# EAGLE board pms (EAGLE 9.6.1)
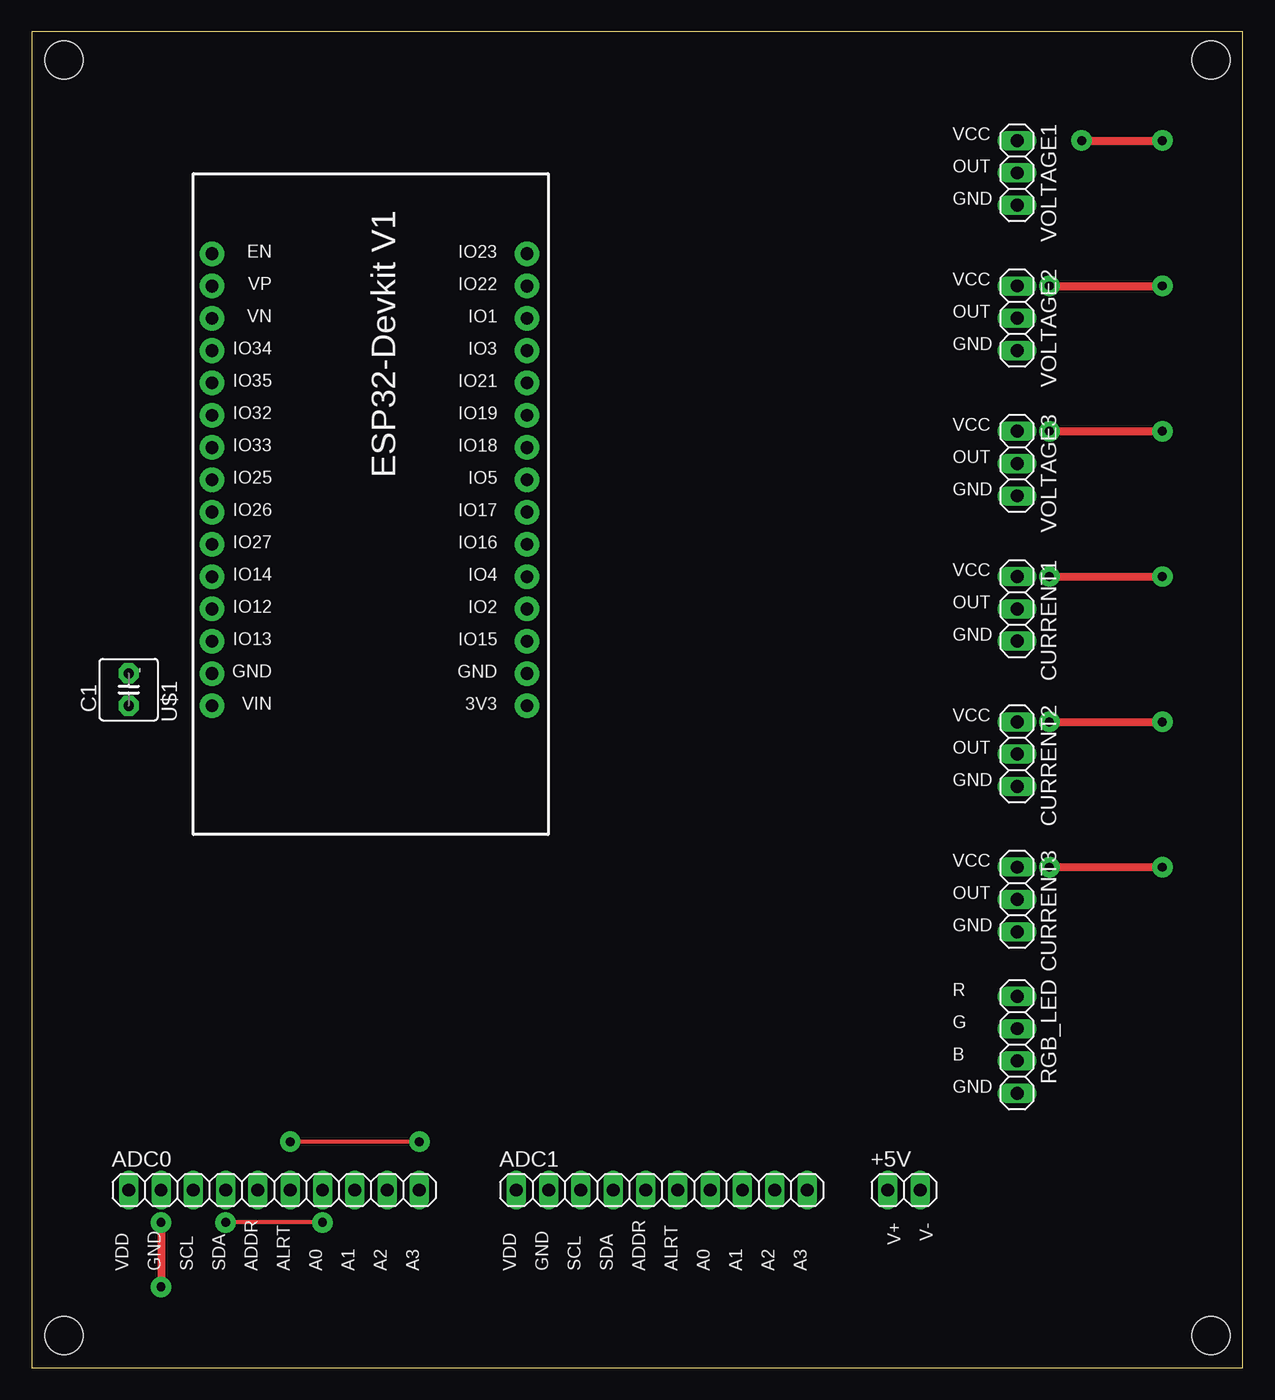
[diagram p0: board, top side]
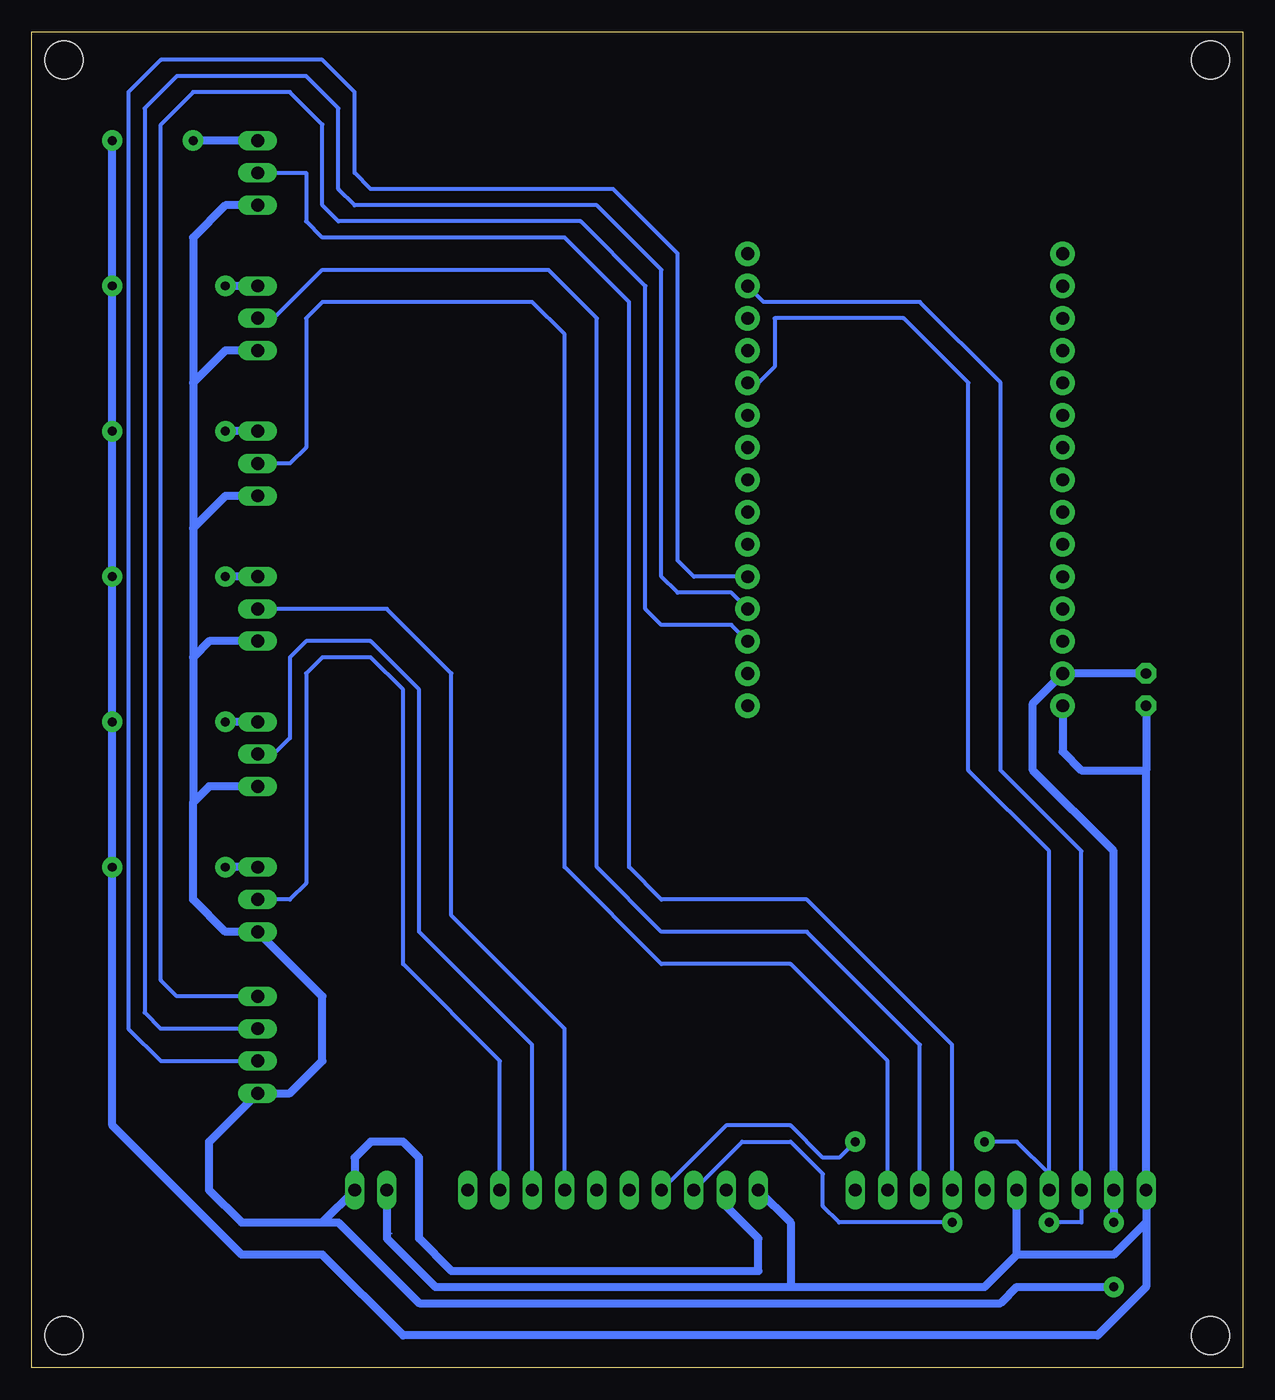
[diagram p1: board, bottom side, seen from below]

Size 95.23 x 105.08 mm. Coordinates in mm from the lower left corner, seen from the top.
Outline: 0,0 95.23,0 95.23,105.08 0,105.08 0,0
Copper layers (1*16): Top 0.035mm / dielectric 1.5mm / Bottom 0.035mm
Design rules "default": minimum track width 6mil, minimum drill 0.35mm, track to track 6mil, track to pad 6mil, pad to pad 6mil, via to via 6mil, smd to smd 6mil, copper to edge 40mil, drill to drill 6mil, minimum pad ring 10mil, minimum via ring 8mil, stop-mask expansion 4mil, vias tented up to drill 0mil, thermal gap 10mil
Holes 3 mm at 2.54,102.87 2.54,2.54 92.71,2.54 92.71,102.87

## Footprints (pad centres in the part's own frame; a part is rotated, then mirrored left to right if it is on the bottom)
1X02 = drill 1.016 long: 1 -1.27,0; 2 1.27,0
1X10 = drill 1.016 long: 1 -11.43,0; 2 -8.89,0; 3 -6.35,0; 4 -3.81,0; 5 -1.27,0; 6 1.27,0; 7 3.81,0; 8 6.35,0; 9 8.89,0; 10 11.43,0
C2.5-5 = drill 0.813 pad 1.6 octagon: 1 -1.27,0; 2 1.27,0
1X03 = drill 1.016 long: 1 -2.54,0; 2 0,0; 3 2.54,0
1X04 = drill 1.016 long: 1 -3.81,0; 2 -1.27,0; 3 1.27,0; 4 3.81,0
ESP32-DEVKITV1 = drill 1 pad 1.93: 1 -22.87,-13.54; 2 -20.33,-13.54; 3 -17.79,-13.54; 4 -15.25,-13.54; 5 -12.71,-13.54; 6 -10.17,-13.54; 7 -7.63,-13.54; 8 -5.09,-13.54; 9 -2.55,-13.54; 10 -0.01,-13.54; 11 2.53,-13.54; 12 5.07,-13.54; 13 7.61,-13.54; 14 10.15,-13.54; 15 12.69,-13.54; 16 12.69,11.23; 17 10.15,11.23; 18 7.61,11.23; 19 5.07,11.23; 20 2.53,11.23; 21 -0.01,11.23; 22 -2.55,11.23; 23 -5.09,11.23; 24 -7.63,11.23; 25 -10.17,11.23; 26 -12.71,11.23; 27 -15.25,11.23; 28 -17.79,11.23; 29 -20.33,11.23; 30 -22.87,11.23

## Placement (x,y rotation side)
+5V  [1X02]  68.58,13.97 0 top
ADC0  [1X10]  19.05,13.97 0 top
ADC1  [1X10]  49.53,13.97 0 top
C1  [C2.5-5]  7.62,53.34 90 top
CURRENT1  [1X03]  77.47,59.69 270 top
CURRENT2  [1X03]  77.47,48.26 270 top
CURRENT3  [1X03]  77.47,36.83 270 top
RGB_LED  [1X04]  77.47,25.4 270 top
U$1  ESP32DEVKITV1  [ESP32-DEVKITV1]  25.4,74.93 90 top
VOLTAGE1  [1X03]  77.47,93.98 270 top
VOLTAGE2  [1X03]  77.47,82.55 270 top
VOLTAGE3  [1X03]  77.47,71.12 270 top

## Library data of the parts
+5V ADC0 ADC1 CURRENT1-CURRENT3 RGB_LED VOLTAGE1-VOLTAGE3 = pinhead
C1 = capacitor-wima
U$1 = ESP32-DEVKITV1

## Nets
A0: ADC0.7 VOLTAGE1.2
A1: ADC0.8 VOLTAGE2.2
A2: ADC0.9 VOLTAGE3.2
A3: ADC1.7 CURRENT1.2
A4: ADC1.8 CURRENT2.2
A5: ADC1.9 CURRENT3.2
B: RGB_LED.3 U$1.5
G: RGB_LED.2 U$1.4
GND: +5V.2 ADC0.2 ADC1.2 C1.2 CURRENT1.3 CURRENT2.3 CURRENT3.3 RGB_LED.4 U$1.29 VOLTAGE1.3 VOLTAGE2.3 VOLTAGE3.3
N$6: ADC0.6
N$10: ADC0.10
N$15: ADC1.5
N$16: ADC1.6
N$20: ADC1.10
R: RGB_LED.1 U$1.3
SCL: ADC0.3 ADC1.3 U$1.14
SDA: ADC0.4 ADC1.4 U$1.11
VDD: +5V.1 ADC0.1 ADC0.5 ADC1.1 C1.1 CURRENT1.1 CURRENT2.1 CURRENT3.1 U$1.30 VOLTAGE1.1 VOLTAGE2.1 VOLTAGE3.1

## Tracks (layer width: path | path; a pad name or v marks a point on that pad's centre or on a via)
A0
  Bottom 0.305: ADC0.7 22.86,25.4 34.29,36.83 45.72,36.83 48.26,39.37 48.26,83.82 53.34,88.9 72.39,88.9 73.66,90.17 73.66,93.98 VOLTAGE1.2
A1
  Bottom 0.305: ADC0.8 25.4,25.4 34.29,34.29 45.72,34.29 50.8,39.37 50.8,82.55 54.61,86.36 72.39,86.36 76.2,82.55 VOLTAGE2.2
A2
  Bottom 0.305: ADC0.9 27.94,24.13 35.56,31.75 45.72,31.75 53.34,39.37 53.34,81.28 55.88,83.82 72.39,83.82 73.66,82.55 73.66,72.39 74.93,71.12 VOLTAGE3.2
A3
  Bottom 0.305: CURRENT1.2 67.31,59.69 62.23,54.61 62.23,35.56 53.34,26.67 ADC1.7
A4
  Bottom 0.305: 78.74,48.26 CURRENT2.2 76.2,48.26 74.93,49.53 74.93,55.88 73.66,57.15 68.58,57.15 64.77,53.34 64.77,34.29 55.88,25.4 ADC1.8
A5
  Bottom 0.305: ADC1.9 58.42,24.13 66.04,31.75 66.04,53.34 68.58,55.88 72.39,55.88 73.66,54.61 73.66,38.1 74.93,36.83 CURRENT3.2
B
  Bottom 0.305: U$1.5 43.17,62.22 44.45,63.5 44.45,87.63 49.53,92.71 68.58,92.71 69.85,93.98 69.85,100.33 72.39,102.87 85.09,102.87 87.63,100.33 87.63,26.67 85.09,24.13 RGB_LED.3
G
  Bottom 0.305: U$1.4 40.22,60.96 44.45,60.96 45.72,62.23 45.72,86.36 50.8,91.44 69.85,91.44 71.12,92.71 71.12,99.06 73.66,101.6 83.82,101.6 86.36,99.06 86.36,27.94 85.09,26.67 RGB_LED.2
GND  (via drill 0.7 pad 1.6)
  Top 0.61: v10.16,11.43 v10.16,6.35
  Bottom 0.305: 40.64,12.7 ADC1.2
  Bottom 0.61: CURRENT1.3 81.28,57.15 82.55,55.88 | CURRENT2.3 81.28,45.72 82.55,44.45 | 82.55,55.88 82.55,44.45 | 82.55,44.45 82.55,36.83 80.01,34.29 CURRENT3.3 72.39,29.21 72.39,24.13 74.93,21.59 RGB_LED.4 81.28,17.78 81.28,13.97 78.74,11.43 72.39,11.43 | VOLTAGE3.3 80.01,68.58 82.55,66.04 | 82.55,66.04 82.55,55.88 | VOLTAGE2.3 80.01,80.01 82.55,77.47 | 82.55,77.47 82.55,66.04 | VOLTAGE1.3 80.01,91.44 82.55,88.9 82.55,77.47 | 72.39,11.43 +5V.2 69.85,16.51 68.58,17.78 66.04,17.78 64.77,16.51 64.77,10.16 62.23,7.62 38.1,7.62 38.1,10.16 40.64,12.7 | C1.2 U$1.29 16.51,52.26 16.51,46.99 10.16,40.64 ADC0.2 v10.16,11.43 | 72.39,11.43 71.12,11.43 64.77,5.08 19.05,5.08 17.78,6.35 v10.16,6.35
R
  Bottom 0.305: U$1.3 40.22,58.42 45.72,58.42 46.99,59.69 46.99,85.09 52.07,90.17 71.12,90.17 72.39,91.44 72.39,97.79 74.93,100.33 82.55,100.33 85.09,97.79 85.09,30.48 83.82,29.21 RGB_LED.1
SCL  (via drill 0.7 pad 1.6)
  Top 0.305: v22.86,11.43 v15.24,11.43
  Bottom 0.305: U$1.14 37.68,83.82 25.4,83.82 19.05,77.47 19.05,46.99 12.7,40.64 ADC0.3 12.7,11.43 v15.24,11.43 | ADC1.3 39.37,17.78 35.56,17.78 33.02,15.24 33.02,12.7 31.75,11.43 v22.86,11.43
SDA  (via drill 0.7 pad 1.6)
  Top 0.305: v30.48,17.78 v20.32,17.78
  Bottom 0.305: U$1.11 38.11,77.46 36.83,78.74 36.83,82.55 26.67,82.55 21.59,77.47 21.59,46.99 15.24,40.64 ADC0.4 15.24,15.24 17.78,17.78 v20.32,17.78 | ADC1.4 40.64,19.05 35.56,19.05 33.02,16.51 31.75,16.51 v30.48,17.78
VDD  (via drill 0.7 pad 1.6)
  Top 0.61: v82.55,96.52 v88.9,96.52 | v80.01,85.09 v88.9,85.09 | v80.01,73.66 v88.9,73.66 | v80.01,62.23 v88.9,62.23 | v80.01,50.8 v88.9,50.8 | v80.01,39.37 v88.9,39.37
  Bottom 0.61: ADC0.1 7.62,46.99 | 7.62,12.7 ADC0.1 | +5V.1 67.31,10.16 63.5,6.35 35.56,6.35 | 35.56,6.35 20.32,6.35 17.78,8.89 | 17.78,8.89 ADC0.5 | ADC0.1 7.62,11.43 10.16,8.89 17.78,8.89 | ADC1.1 35.56,11.43 35.56,6.35 | VOLTAGE1.1 v82.55,96.52 | VOLTAGE2.1 v80.01,85.09 | VOLTAGE3.1 v80.01,73.66 | CURRENT1.1 v80.01,62.23 | CURRENT2.1 v80.01,50.8 | CURRENT3.1 v80.01,39.37 | ADC0.1 7.62,6.35 11.43,2.54 66.04,2.54 72.39,8.89 78.74,8.89 88.9,19.05 v88.9,39.37 v88.9,50.8 v88.9,62.23 v88.9,73.66 v88.9,85.09 v88.9,96.52 | C1.1 7.62,46.99 | U$1.30 14.17,48.46 12.7,46.99 7.62,46.99

## Text on the board
Bottom: - | -
tNames: VCC | OUT | GND | VCC | OUT | GND | VCC | OUT | GND | VCC | OUT | GND | - | VCC | OUT | GND | VCC | OUT | GND | R | G | B | GND | V+ | V- | VDD | GND | SCL | SDA | ADDR | ALRT | A0 | A1 | A2 | A3 | VDD | GND | SCL | SDA | ADDR | ALRT | A0 | A1 | A2 | A3